# EAGLE board schematic_old (EAGLE 8.2.0)
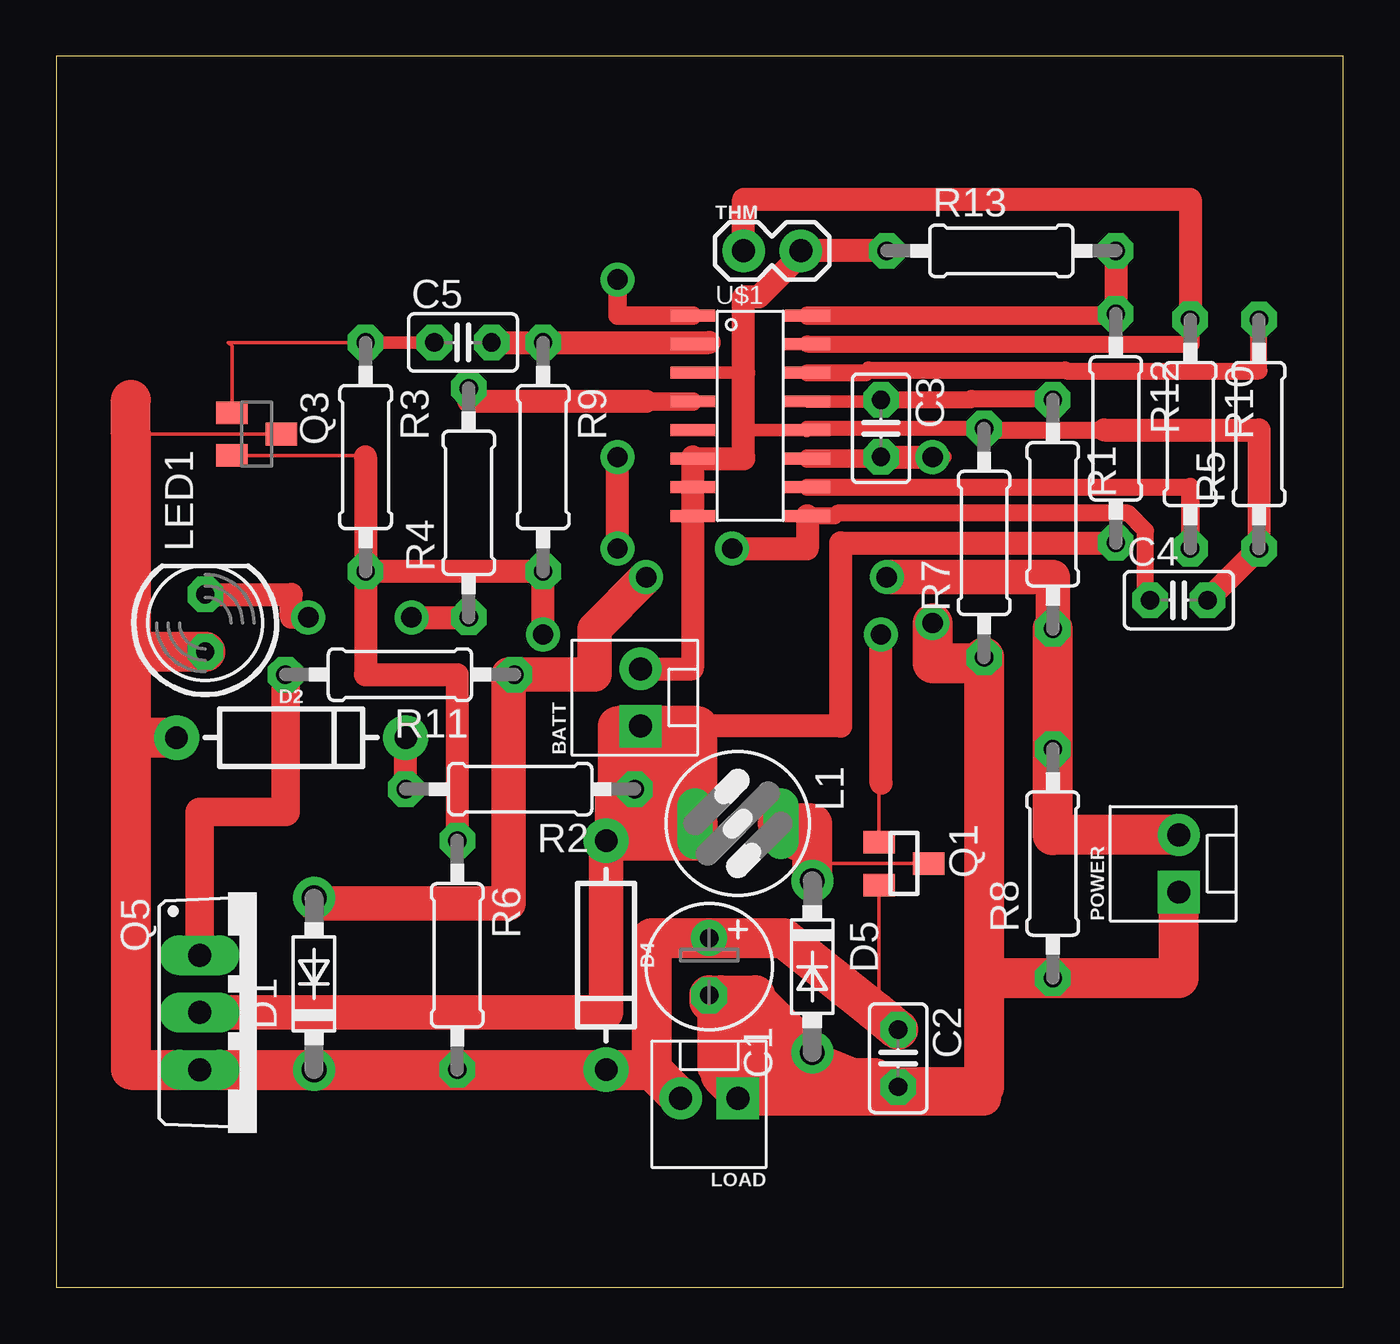
[diagram p0: board, top side]
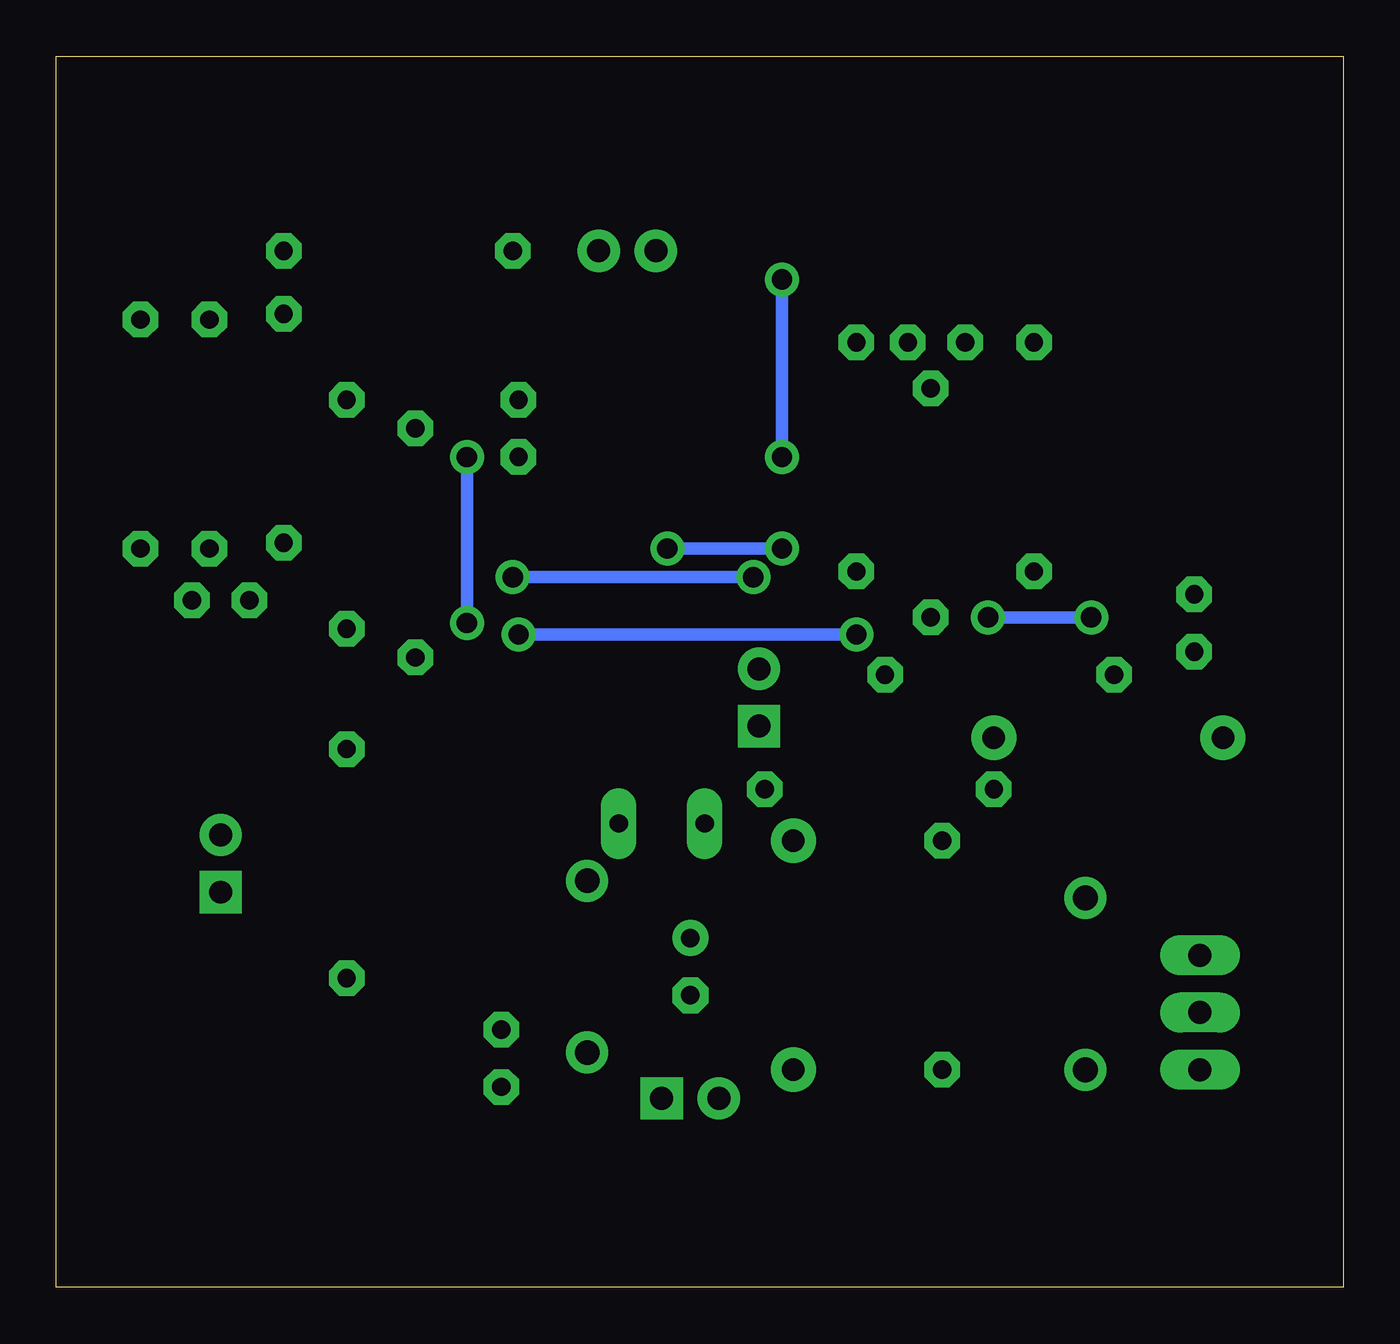
[diagram p1: board, bottom side, seen from below]

Size 57.07 x 54.6 mm. Coordinates in mm from the lower left corner, seen from the top.
Outline: 0,0 57.07,0 57.07,54.6 0,54.6 0,0
Copper layers (1*16): Top 0.035mm / dielectric 1.5mm / Bottom 0.035mm
Design rules "default *": minimum track width 6mil, minimum drill 0.35mm, track to track 6mil, track to pad 6mil, pad to pad 6mil, via to via 6mil, smd to smd 6mil, copper to edge 40mil, drill to drill 6mil, minimum pad ring 15mil, minimum via ring 12mil, stop-mask expansion 4mil, vias tented up to drill 0mil, thermal gap 10mil

## Footprints (pad centres in the part's own frame; a part is rotated, then mirrored left to right if it is on the bottom)
MOLEX-1X2 = drill 1.016 pad 1.88 square: 1 0,0 | drill 1.016 pad 1.88: 2 2.54,0
E2,5-6 = drill 0.813 pad 1.6: + -1.27,0 | drill 0.813 pad 1.6 octagon: - 1.27,0
C025-025X050 = drill 0.813 octagon: 1 -1.27,0; 2 1.27,0
DO41-7.6 = drill 1.1 pad 1.7: A 3.81,0; C -3.81,0
DIODE-1N4001 = drill 1 pad 1.981: A -5.08,0; C 5.08,0
82114R = drill 0.813 long: 1 0,1.905; 2 0,-1.905
LED5MM = drill 0.813 octagon: A -1.27,0; K 1.27,0
SUPER-SOT3 = smd 1 x 1.4: 1 -0.95,-1.1; 2 0.95,-1.1; 3 0,1.1
SOT23 = smd 1 x 1.4: 1 -0.95,-1.1; 2 0.95,-1.1; 3 0,1.1
TO220BV = drill 1.016 long: D 0,-2.54; G -2.54,-2.54; S 2.54,-2.54
0207/10 = drill 0.813 octagon: 1 -5.08,0; 2 5.08,0
1X02 = drill 1.016 pad 1.88: 1 0,0; 2 2.54,0
DS2715-SO16 = smd 1.98 x 0.53: 1 -2.5,4.5; 2 -2.5,3.23; 3 -2.5,1.96; 4 -2.5,0.69; 5 -2.5,-0.58; 6 -2.5,-1.85; 7 -2.5,-3.12; 8 -2.5,-4.39; 9 2.58,-4.39; 10 2.58,-3.12; 11 2.58,-1.85; 12 2.58,-0.58; 13 2.58,0.69; 14 2.58,1.96; 15 2.58,3.23; 16 2.58,4.5

## Placement (x,y rotation side)
BATT  [MOLEX-1X2]  25.91,24.89 90 top
C1  47uF  [E2,5-6]  28.96,14.22 270 top
C2  1uF  [C025-025X050]  37.34,10.16 270 top
C3  0.1uF  [C025-025X050]  36.58,38.1 270 top
C4  0.1uF  [C025-025X050]  49.78,30.48 0 top
C5  1nF  [C025-025X050]  18.03,41.91 0 top
D1  1N5817-B  [DO41-7.6]  11.43,13.46 90 top
D2  1A/50V/1.1V  [DIODE-1N4001]  10.41,24.38 0 top
D4  1A/50V/1.1V  [DIODE-1N4001]  24.38,14.73 270 top
D5  1N5817-B  [DO41-7.6]  33.53,14.22 270 top
L1  82114R  [82114R]  30.23,20.57 270 top
LED1  [LED5MM]  6.6,29.46 90 top
LOAD  [MOLEX-1X2]  30.23,8.38 180 top
POWER  [MOLEX-1X2]  49.78,17.53 90 top
Q1  FDN360P  [SUPER-SOT3]  37.59,18.8 270 top
Q3  BSS123  [SOT23]  8.89,37.85 270 top
Q5  [TO220BV]  8.89,12.19 270 top
R1  150  [0207/10]  44.2,34.29 270 top
R2  220  [0207/10]  20.57,22.1 180 top
R3  820  [0207/10]  13.72,36.83 270 top
R4  1k  [0207/10]  18.29,34.8 90 top
R5  160k  [0207/10]  53.34,37.85 90 top
R6  330  [0207/10]  17.78,14.73 270 top
R7  0.1  [0207/10]  41.15,33.02 90 top
R8  100k  [0207/10]  44.2,18.8 90 top
R9  470  [0207/10]  21.59,36.83 270 top
R10  10k  [0207/10]  50.29,37.85 270 top
R11  100  [0207/10]  15.24,27.18 180 top
R12  500k  [0207/10]  46.99,38.1 270 top
R13  100k  [0207/10]  41.91,45.97 0 top
THM  [1X02]  30.48,45.97 0 top
U$1  DS2715  [DS2715-SO16]  30.73,38.61 0 top

## Library data of the parts
BATT LOAD POWER = SparkFun-Connectors; SF_ID: PRT-09918
C1-C5 R1-R13 = rcl
D1 D5 = diode
D2 D4 = SparkFun-DiscreteSemi; PROD_ID: DIO-09176
L1 = inductors
LED1 = led
Q1 Q5 = transistor-power
Q3 = transistor-small-signal
THM = SparkFun-Connectors
U$1 = ic-ds2715-nimh-charger

## Nets
GND: C1.- C2.2 C3.2 D5.A LOAD.1 POWER.1 R7.1 R8.1 U$1.11
N$1: Q5.G R11.2
N$4: BATT.2 C4.2 R5.1 R7.2 R13.1 THM.2 U$1.3 U$1.6 U$1.7 U$1.8 U$1.12
N$5: R10.1 THM.1 U$1.15
N$6: R10.2 U$1.10
N$7: R12.1 R13.2 U$1.16
N$8: BATT.1 D4.A L1.2 Q5.D R2.1 R12.2
N$9: R4.2 U$1.4
N$10: D5.C L1.1 Q1.3
N$12: C5.2 R9.1 U$1.2
N$13: Q1.1 Q3.2 R3.2 R6.1 R9.2
N$14: C5.1 Q3.1 R3.1
N$15: LED1.K R4.1
N$17: D2.C R2.2
N$19: C3.1 R1.1 U$1.13
N$20: R5.2 U$1.14
N$23: C4.1 U$1.1 U$1.9
N$25: D1.A POWER.2 R1.2 R8.2 R11.1
N$26: C1.+ C2.1 D1.C D2.A D4.C LED1.A LOAD.2 Q1.2 Q3.3 Q5.S R6.2

## Tracks (layer width: path | path; a pad name or v marks a point on that pad's centre or on a via)
GND  (via drill 0.9)
  Top 0.559: U$1.11 38.54,36.76 38.61,36.83 | LOAD.1 33.53,8.38 D5.A | C1.- 28.96,10.41 30.23,10.41 30.23,8.89
  Top 0.66: v38.86,36.83 39.37,36.83 38.61,36.83
  Top 0.813: U$1.11 36.58,36.76 C3.2
  Top 1.016: 41.15,27.69 41.15,13.72 | 41.15,13.72 R8.1 49.78,13.72 | 41.15,8.89 41.15,13.72 | C2.2 D5.A 33.02,9.4 29.46,12.95 C1.- 28.96,9.65 LOAD.1 | C3.2 38.61,36.83
  Top 1.27: R7.1 41.15,27.69 41.15,8.89 | 30.23,8.89 LOAD.1
  Top 1.524: LOAD.1 41.15,8.38 41.15,8.89 | LOAD.1 34.04,8.38 34.04,9.4 36.32,9.4 C2.2 | 30.23,9.87 LOAD.1 | 30.99,12.95 D5.A
  Top 1.778: v38.86,29.46 38.86,27.69 41.15,27.69 | R7.1 41.15,8.89 C2.2 | 41.15,13.72 49.78,13.72 POWER.1 | D5.A 29.97,8.89 29.67,9.2 29.46,9.41 29.46,12.95 | 30.99,12.95 C1.- 28.96,12.7 32,9.65 32.77,9.65 33.02,9.4
  Bottom 0.559: v38.86,36.83 v38.86,29.46
N$1
  Top 1.27: Q5.G 6.35,21.08 10.16,21.08 R11.2
N$4
  Top 0.559: 30.48,38.03 30.48,36.83 28.23,36.83 U$1.6 U$1.7 U$1.8 28.19,27.57 | U$1.3 30.48,40.57 30.48,38.03 | 32.87,45.66 THM.2 | 33.27,38.03 U$1.12 33.27,38.03 | 33.27,38.03 33.27,38.1 | 33.27,38.03 30.48,38.03
  Top 0.66: R7.2 33.27,38.1 33.27,38.03
  Top 0.711: 41.15,38.03 R7.2
  Top 0.762: 41.15,38.03 46.48,38.03
  Top 0.813: 53.34,38.1 R5.1
  Top 1.016: R13.1 THM.2 | BATT.2 28.19,27.43 28.19,27.57 28.23,27.57 28.23,36.83 | U$1.6 30.48,36.76 30.48,36.83 30.48,40.57 30.48,43.94 31.16,43.94 32.87,45.66 | 46.48,38.03 53.34,38.03 R5.1 C4.2
N$5
  Top 0.762: U$1.15 50.29,41.84
  Top 0.813: 50.29,41.84 R10.1
  Top 1.016: THM.1 30.48,48.26 50.29,48.26 R10.1
N$6
  Top 0.762: U$1.10 50.29,35.49
  Top 0.813: 50.29,35.49 R10.2
N$7
  Top 0.559: 46.99,43.11 R12.1 R13.2
  Top 0.813: U$1.16 46.99,43.11
  Top 1.016: R13.2 46.99,43.11
N$8
  Top 0.559: BATT.1 25.91,24.38 | 25.91,22.1 28.19,20.7 L1.2
  Top 1.016: 28.32,19.81 27.1,19.81 D4.A 24.38,22.1 R2.1 | L1.2 25.65,20.57 R2.1 | R2.1 25.91,22.1 25.91,24.38 | 28.45,24.89 34.8,24.89 34.8,33.02 R12.2
  Top 1.524: Q5.D 24.38,12.19 D4.A
  Top 1.778: 28.19,21.34 28.19,21.59 25.15,21.59 25.15,19.81 D4.A 28.32,19.81 L1.2 28.45,20.57 28.45,24.89 26.92,24.89 | 24.89,22.35 24.89,24.89 BATT.1 26.92,24.89 | 26.92,24.89 26.92,22.61 27.1,22.61 27.1,19.81
N$9
  Top 0.813: U$1.4 26.16,39.3
  Top 1.016: 26.16,39.3 18.29,39.3 R4.2
N$10
  Top 0.152: Q1.3 33.53,18.8
  Top 0.559: D5.C 33.53,18.8 33.53,19.18 32.89,19.81
  Top 1.778: D5.C 33.53,18.8 33.53,20.57 L1.1 | 32,20.57 L1.1 | 32.89,19.81 L1.1
N$12
  Top 0.559: U$1.2 24.64,41.84 R9.1 C5.2
  Top 1.016: C5.2 28.96,41.91
N$13  (via drill 0.9)
  Top 0.152: Q1.1 36.49,22.27 36.58,22.35 | Q3.2 13.65,36.9 13.72,36.83
  Top 1.016: 36.58,22.35 v36.58,28.96 | v21.59,28.96 R9.2 R3.2 | R3.2 13.72,27.18 17.78,27.18 R6.1 | 13.72,36.83 R3.2
  Bottom 0.559: v36.58,28.96 v21.59,28.96
N$14
  Top 0.152: Q3.1 7.79,41.74 7.62,41.91 R3.1
  Top 0.559: R3.1 C5.1
N$15  (via drill 0.9)
  Top 1.016: v15.75,29.72 R4.1 | LED1.K 10.41,30.73 10.41,29.72 v11.18,29.72
  Bottom 0.559: v15.75,29.72 v11.18,29.72
N$17
  Top 1.016: R2.2 D2.C
N$19
  Top 0.559: U$1.13 36.58,39.3 C3.1
  Top 0.762: C3.1 40.55,39.37 40.6,39.42 44.04,39.42 44.14,39.32
  Top 0.813: 44.14,39.32 R1.1
N$20
  Top 0.762: U$1.14 35.91,40.57 36.03,40.69 44.74,40.69 44.79,40.64 53.34,40.64 R5.2
N$23  (via drill 0.9)
  Top 0.762: U$1.9 34.52,34.22 34.65,34.34 47.54,34.34 48.31,33.57 48.31,30.68 C4.1
  Top 0.813: U$1.1 24.89,43.11 v24.89,44.7
  Top 1.016: v24.89,32.77 v24.89,36.83 | v29.97,32.77 33.31,32.77 U$1.9
  Bottom 0.559: v29.97,32.77 v24.89,32.77 | v24.89,36.83 v24.89,44.7
N$25  (via drill 0.9)
  Top 0.559: 19.3,27.18 R11.1
  Top 1.016: R1.2 R8.2 44.2,20.07
  Top 1.524: v26.16,31.5 23.88,29.21 23.88,27.18 R11.1 20.07,27.18 20.07,17.02 11.43,17.02 D1.A | v36.83,31.5 44.2,31.5 R1.2
  Top 1.778: POWER.2 44.2,20.07 R1.2
  Bottom 0.559: v26.16,31.5 v36.83,31.5
N$26
  Top 0.152: Q1.2 36.49,12.54 36.25,12.3 | Q3.3 3.3,37.85
  Top 0.559: 28.7,15.49 C1.+
  Top 1.016: 28.7,15.49 26.92,15.49
  Top 1.27: 3.3,9.65 Q5.S D1.C R6.2 D4.C 26.42,9.65 | 26.92,15.49 C1.+
  Top 1.778: 3.3,39.37 3.3,37.85 3.3,28.19 | 3.3,28.19 LED1.A | 3.3,28.19 3.3,24.38 | 3.3,24.38 D2.A | 3.3,24.38 3.3,9.65 26.42,9.65 | 26.42,9.65 LOAD.2 | 26.42,9.65 26.42,15.49 C1.+ 32.26,15.49 36.25,12.3 C2.1